# EAGLE board Coil_22_10_1.8_v9 (EAGLE 9.7.0)

Size 54 x 54 mm. Coordinates in mm from the lower left corner, seen from the top.
Outline: circle at 27,27 radius 27
Outline: circle at 27,27 radius 8
Copper layers (1*16): Top 0.035mm / dielectric 1.5mm / Bottom 0.035mm
Design rules "Fusion Electronics Design Rules": minimum track width 6mil, minimum drill 0.35mm, track to track 6mil, track to pad 6mil, pad to pad 6mil, via to via 6mil, smd to smd 6mil, copper to edge 0.5mm, drill to drill 0.4mm, minimum pad ring 10mil, minimum via ring 8mil, stop-mask expansion 4mil, vias tented up to drill 0mil, thermal gap 10mil

## Footprints (pad centres in the part's own frame; a part is rotated, then mirrored left to right if it is on the bottom)
COIL_22_10_1.8 = drill 1 square: P$1 -1.27,24.75; P$2 1.27,24.75 | drill 1: P$3 0,-10
1X02 = drill 1.016 long: 1 -1.27,0; 2 1.27,0

## Placement (x,y rotation side)
U$3  COIL_22_10_1.8  [COIL_22_10_1.8]  27,27 0 top
U$4  PINHD-1X02_1X02M  [1X02]  27,2.25 0 top

## Library data of the parts
U$3 = Trace_Coils
U$4 = Tinkercad